# Altium PCB Electronic_dc_load_v2.PcbDoc (part 2 of 2)
Units mil, origin at the board's own origin, x right, y up, seen from the top; angles counter-clockwise.
Board outline 20669.29 x 4035.43 mil, 2 copper layers (Top Layer, Bottom Layer); 130 components, 99 nets, 414 pads, 0 vias.
Unrouted connection lines stored in the file: 291.
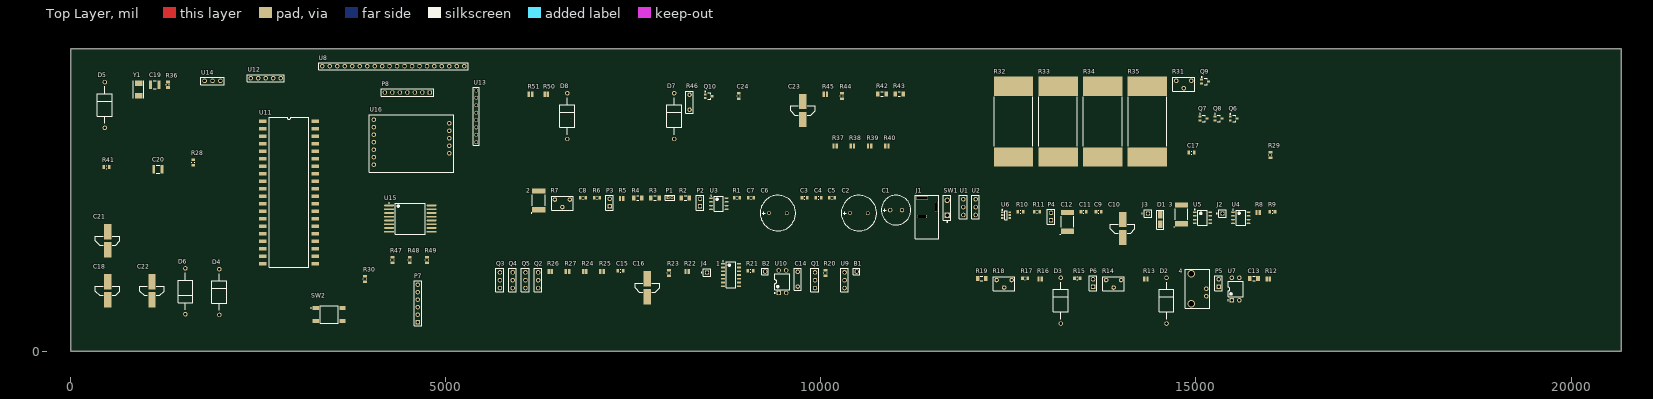
[diagram p0: Top Layer view]

## Part data (continued)
R14: "BOURNS         3296Y-1-504LF            TRIMMER, 25 TURN 500K", Color=Blue, Manufacturer=Bourns, Manufacturer Part Number=3296Y-1-504LF, Max Operating Temperature=125°C, Max Power Dissipation=500mW, Min Operating Temperature=-55°C, Package Quantity=50, Resistance=500kR, Resistance Tolerance=10%, Resistor Type=Cermet, Temperature Coefficient=100ppm/°C, Voltage Rating=300V, Category="Variable Resistors and Potentiometers", ComponentLink1Description=https://datasheet.ciiva.com/11832/0900766b8069ccf4-11832260.pdf?src-supplier=RSComponents, ComponentLink1URL=https://datasheet.ciiva.com/11832/0900766b8069ccf4-11832260.pdf?src-supplier=RSComponents, ComponentLink2Description=https://datasheet.ciiva.com/29122/447312-da-01-en-trimmer-tht-3296y-1-504lf-500k-0-5w-29122395.pdf?src-supplier=Conrad, ComponentLink2URL=https://datasheet.ciiva.com/29122/447312-da-01-en-trimmer-tht-3296y-1-504lf-500k-0-5w-29122395.pdf?src-supplier=Conrad, ComponentLink3Description=https://datasheet.ciiva.com/2156/3296-2156913.pdf?src-supplier=Digi-Key, ComponentLink3URL=https://datasheet.ciiva.com/2156/3296-2156913.pdf?src-supplier=Digi-Key, ComponentLink4Description=https://datasheet.ciiva.com/1131/1815117-1131508.pdf?src-supplier=Element14, ComponentLink4URL=https://datasheet.ciiva.com/1131/1815117-1131508.pdf?src-supplier=Element14, ComponentLink5Description=https://datasheet.ciiva.com/3266/3296-3266550.pdf?src-supplier=Avnet, ComponentLink5URL=https://datasheet.ciiva.com/3266/3296-3266550.pdf?src-supplier=Avnet, ComponentLink6Description=https://datasheet.ciiva.com/20164/68-0300e-20164135.pdf?src-supplier=Rapid+Electronics, ComponentLink6URL=https://datasheet.ciiva.com/20164/68-0300e-20164135.pdf?src-supplier=Rapid+Electronics, ComponentLink7Description=https://datasheet.ciiva.com/16716/70153578-16716249.pdf?src-supplier=Allied+Electronics, ComponentLink7URL=https://datasheet.ciiva.com/16716/70153578-16716249.pdf?src-supplier=Allied+Electronics, ComponentLink8Description=https://datasheet.ciiva.com/30113/3296-30113148.pdf?src-supplier=Onlinecomponents.com, ComponentLink8URL=https://datasheet.ciiva.com/30113/3296-30113148.pdf?src-supplier=Onlinecomponents.com, ComponentLink9Description=https://datasheet.ciiva.com/32423/dabourns3296-data-e-32423743.pdf?src-supplier=Distrelec, ComponentLink9URL=https://datasheet.ciiva.com/32423/dabourns3296-data-e-32423743.pdf?src-supplier=Distrelec, Depth=4.83mm, Height=0.395inch, Lead Diameter=0.5mm, Lead Free="Lead Free", Length=9.53mm, Military Standard=Not, Mount="Through Hole,Panel,PCB", Number of Turns=25, Packaging=Rail/Tube, Power Rating=500mW, Pricing 1="1=2.41000, 10=2.11700, 25=1.89800, 50=1.82500, 100=1.75200, 250=1.67900, 500=1.38700, 1000=1.31400, 5000=1.09500 (USD)", Radiation Hardening=No, REACH SVHC="No SVHC", RoHS=Yes, RoHS Compliant=Yes, Series=3296, Stock 1=290, Supplier 1=Digi-Key, Taper=Linear, Technology=CERMET, Termination=Pin, Tolerance=10%, Voltage Rating (DC)=300V, Weight=0.03oz, Width=0.19inch
R17 R20 R21 R28 R29 R36 R41: "VISHAY   MCW0406MD1001BP100   RES, THIN FILM, 1K, 0.1%, 0.25W, 0406", Case Code (Imperial)=0406, Case Code (Metric)=1610, Manufacturer=Vishay, Manufacturer Part Number=MCW0406MD1001BP100, Max Operating Temperature=155°C, Max Power Dissipation=250mW, Min Operating Temperature=-55°C, Package Quantity=1000, Resistance Tolerance=0.1%, Resistor Type="Thin Film", Supplier Part Number 1=31W9014, Temperature Coefficient=25ppm/°C, Voltage Rating=50V, Case/Package=0406, Category="Chip SMD Resistors", ComponentLink1Description=https://datasheet.ciiva.com/2610/mcw406atpre-2610743.pdf?src-supplier=Digi-Key, ComponentLink1URL=https://datasheet.ciiva.com/2610/mcw406atpre-2610743.pdf?src-supplier=Digi-Key, ComponentLink2Description=https://datasheet.ciiva.com/2610/mcw406atpre-2610744.pdf?src-supplier=Digi-Key, ComponentLink2URL=https://datasheet.ciiva.com/2610/mcw406atpre-2610744.pdf?src-supplier=Digi-Key, ComponentLink3Description=https://datasheet.ciiva.com/2610/mcw406atpre-2610745.pdf?src-supplier=Digi-Key, ComponentLink3URL=https://datasheet.ciiva.com/2610/mcw406atpre-2610745.pdf?src-supplier=Digi-Key, Construction=Rectangular, Contact Plating=Tin, Depth=1.5mm, Features="Automotive AEC-Q200,Moisture Resistant,Anti-Sulfur", Height=0.014inch, Height - Seated (Max)=0.014inch, Lead Free="Lead Free", Length=0.039inch, Military Standard=Not, Number of Terminations=2, Packaging="Tape and Reel", Power Rating=250mW, Pricing 1="1000=0.44000 (USD)", REACH SVHC=Unknown, Resistance=1kR, RoHS=Yes, RoHS Compliant=Yes, Series="MCW0406 - Precision", Size Code=0406, Supplier 1=Newark, Tolerance=0.1%, Voltage Rating (DC)=50V, Width=0.063inch
R19: "Resistor SMD 4.7 MOhm  ±  1 % 1206, CRCW12064M70FKEA, Vishay", Case Code (Imperial)=1206, Case Code (Metric)=3216, Manufacturer=Vishay, Manufacturer Part Number=CRCW12064M70FKEA, Max Operating Temperature=155°C, Max Power Dissipation=250mW, Min Operating Temperature=-55°C, Package Quantity=10, Resistance=4.7MR, Resistance Tolerance=1%, Resistor Type="Thick Film", Supplier Part Number 1=541-4.70MFCT-ND, Temperature Coefficient=100ppm/°C, Voltage Rating=200V, Case/Package=1206, Category="Chip SMD Resistors", ComponentLink1Description=https://datasheet.ciiva.com/11811/0900766b80d98b5e-11811376.pdf?src-supplier=RSComponents, ComponentLink1URL=https://datasheet.ciiva.com/11811/0900766b80d98b5e-11811376.pdf?src-supplier=RSComponents, ComponentLink2Description=https://datasheet.ciiva.com/2497/dcrcwe3-2497009.pdf?src-supplier=Digi-Key, ComponentLink2URL=https://datasheet.ciiva.com/2497/dcrcwe3-2497009.pdf?src-supplier=Digi-Key, ComponentLink3Description=https://datasheet.ciiva.com/2497/dcrcwe3-2497010.pdf?src-supplier=Digi-Key, ComponentLink3URL=https://datasheet.ciiva.com/2497/dcrcwe3-2497010.pdf?src-supplier=Digi-Key, ComponentLink4Description=https://datasheet.ciiva.com/2497/dcrcwe3-2497011.pdf?src-supplier=Digi-Key, ComponentLink4URL=https://datasheet.ciiva.com/2497/dcrcwe3-2497011.pdf?src-supplier=Digi-Key, ComponentLink5Description=https://datasheet.ciiva.com/6074/1697337-6074135.pdf?src-supplier=Farnell, ComponentLink5URL=https://datasheet.ciiva.com/6074/1697337-6074135.pdf?src-supplier=Farnell, ComponentLink6Description=https://datasheet.ciiva.com/7843/1697337-7843431.pdf?src-supplier=Element14, ComponentLink6URL=https://datasheet.ciiva.com/7843/1697337-7843431.pdf?src-supplier=Element14, ComponentLink7Description=https://datasheet.ciiva.com/7843/1697337-7843432.pdf?src-supplier=Element14, ComponentLink7URL=https://datasheet.ciiva.com/7843/1697337-7843432.pdf?src-supplier=Element14, ComponentLink8Description=https://datasheet.ciiva.com/8896/dcrcwe3-8896296.pdf?src-supplier=Avnet, ComponentLink8URL=https://datasheet.ciiva.com/8896/dcrcwe3-8896296.pdf?src-supplier=Avnet, ComponentLink9Description=https://datasheet.ciiva.com/16894/dcrcwe3-16894747.pdf?src-supplier=Avnet+Europe, ComponentLink9URL=https://datasheet.ciiva.com/16894/dcrcwe3-16894747.pdf?src-supplier=Avnet+Europe, ComponentLink10Description=https://datasheet.ciiva.com/22706/1697337-22706301.pdf?src-supplier=Element14, ComponentLink10URL=https://datasheet.ciiva.com/22706/1697337-22706301.pdf?src-supplier=Element14, ComponentLink11Description=https://datasheet.ciiva.com/26316/fld-crcw-e3-data-en-26316494.pdf?src-supplier=Distrelec, ComponentLink11URL=https://datasheet.ciiva.com/26316/fld-crcw-e3-data-en-26316494.pdf?src-supplier=Distrelec, Construction=Rectangular, Contact Plating=Tin, Depth=1.6mm, Features="Automotive AEC-Q200", Height=0.55mm, Lead Free="Lead Free", Length=3.2mm, Military Standard=Not, Number of Pins=2, Number of Terminations=2, Packaging="Tape and Reel", Power Rating=250mW, Pricing 1="1=0.10000, 10=0.08000, 100=0.03060, 1000=0.01346, 2500=0.01162 (USD)", Radiation Hardening=No, REACH SVHC=Unknown, RoHS=Yes, RoHS Compliant=Yes, Series=CRCW, Stock 1=13706, Supplier 1=Digi-Key, Technology="THICK FILM", Termination=SMD/SMT, Tolerance=1%, Voltage Rating (DC)=200V, Weight=0.000353oz, Width=0.063inch
R31: "GLOVE, POLYAMIDE, L/FREE, PU, SIZE 6 - More Details", Color=Blue, Manufacturer=Bourns, Manufacturer Part Number=3296Y-1-201LF, Max Operating Temperature=125°C, Max Power Dissipation=500mW, Min Operating Temperature=-55°C, Package Quantity=50, Resistance Tolerance=10%, Resistor Type=Cermet, Supplier Part Number 1=3296Y-201LF-ND, Temperature Coefficient=100ppm/°C, Voltage Rating=300V, Category="Variable Resistors and Potentiometers", ComponentLink1Description=https://datasheet.ciiva.com/11831/0900766b8069ccf4-11831017.pdf?src-supplier=RSComponents, ComponentLink1URL=https://datasheet.ciiva.com/11831/0900766b8069ccf4-11831017.pdf?src-supplier=RSComponents, ComponentLink2Description=https://datasheet.ciiva.com/29122/447304-da-01-en-trimmer-tht3296y-1-201lf-200r-0-5w-29122391.pdf?src-supplier=Conrad, ComponentLink2URL=https://datasheet.ciiva.com/29122/447304-da-01-en-trimmer-tht3296y-1-201lf-200r-0-5w-29122391.pdf?src-supplier=Conrad, ComponentLink3Description=https://datasheet.ciiva.com/16716/70153578-16716822.pdf?src-supplier=Allied+Electronics, ComponentLink3URL=https://datasheet.ciiva.com/16716/70153578-16716822.pdf?src-supplier=Allied+Electronics, ComponentLink4Description=https://datasheet.ciiva.com/30066/3296-30066951.pdf?src-supplier=Onlinecomponents.com, ComponentLink4URL=https://datasheet.ciiva.com/30066/3296-30066951.pdf?src-supplier=Onlinecomponents.com, ComponentLink5Description=https://datasheet.ciiva.com/2158/3296-2158313.pdf?src-supplier=Digi-Key, ComponentLink5URL=https://datasheet.ciiva.com/2158/3296-2158313.pdf?src-supplier=Digi-Key, ComponentLink6Description=https://datasheet.ciiva.com/1131/1815117-1131451.pdf?src-supplier=Element14, ComponentLink6URL=https://datasheet.ciiva.com/1131/1815117-1131451.pdf?src-supplier=Element14, ComponentLink7Description=https://datasheet.ciiva.com/14173/dabourns3296-data-e-14173005.pdf?src-supplier=Distrelec, ComponentLink7URL=https://datasheet.ciiva.com/14173/dabourns3296-data-e-14173005.pdf?src-supplier=Distrelec, Depth=4.83mm, Height=0.395inch, Lead Diameter=0.5mm, Lead Free="Lead Free", Length=9.53mm, Military Standard=Not, Mount="Through Hole,Panel,PCB", Number of Turns=25, Packaging=Rail/Tube, Power Rating=500mW, Pricing 1="1=2.41000, 10=2.11700, 25=1.89800, 50=1.82500, 100=1.75200, 250=1.67900, 500=1.38700, 1000=1.31400, 5000=1.09500 (USD)", Radiation Hardening=No, REACH SVHC="No SVHC", Resistance=200R, RoHS=Yes, RoHS Compliant=Yes, Series=3296, Stock 1=3, Supplier 1=Digi-Key, Taper=Linear, Technology=CERMET, Termination=Pin, Tolerance=10%, Voltage Rating (DC)=300V, Weight=0.03oz, Width=9.53mm
R32 R33 R34 R35: "RES 1 OHM 5W 1% AXIAL", Case/Package=Conformal, Manufacturer="Vishay BCcomponents", Manufacturer Part Number=PAC500001008FAC000, Max Operating Temperature=275°C, Max Power Dissipation=5W, Min Operating Temperature=-55°C, Package Quantity=1, Resistor Type=Wirewound, Supplier Part Number 1=71-PAC500001008FAC00, Temperature Coefficient=100ppm/°C, Tolerance=1%, Category="Through-Hole Resistors", ComponentLink1Description=https://datasheet.ciiva.com/2720/pacserie-2720053.pdf?src-supplier=Digi-Key, ComponentLink1URL=https://datasheet.ciiva.com/2720/pacserie-2720053.pdf?src-supplier=Digi-Key, ComponentLink2Description=https://datasheet.ciiva.com/2720/pacserie-2720054.pdf?src-supplier=Digi-Key, ComponentLink2URL=https://datasheet.ciiva.com/2720/pacserie-2720054.pdf?src-supplier=Digi-Key, ComponentLink3Description=https://datasheet.ciiva.com/8401/pacserie-8401197.pdf?src-supplier=Avnet, ComponentLink3URL=https://datasheet.ciiva.com/8401/pacserie-8401197.pdf?src-supplier=Avnet, Construction=Cylindrical, Contact Plating=Tin, Diameter=7.5mm, Features="Flame Retardant Coating", Length=26mm, Military Standard=Not, Mount="Through Hole", Number of Terminations=2, Packaging="Tape and Reel", Power Rating=5W, Pricing 1="1=1.28000, 10=0.95500, 50=0.95500, 100=0.69800, 1000=0.48800, 10000=0.45600 (USD)", Radiation Hardening=No, Resistance=1R, RoHS=Yes, RoHS Compliant=Yes, Series=PAC, Stock 1=101, Supplier 1=Mouser, Termination=Axial
R37 R38 R39 R40: "270KR ±0.1%  0.25W"
R46: "BOURNS - PWR220T-35-R100F - RESISTOR, POWER, 0.1R, 0.01, 35W", Case/Package=TO-220, Manufacturer=Bourns, Manufacturer Part Number=PWR220T-35-R100F, Max Operating Temperature=155°C, Max Power Dissipation=35W, Min Operating Temperature=-55°C, Package Quantity=50, Resistance=100mR, Resistance Tolerance=1%, Resistor Type="Thick Film", Supplier Part Number 1=PWR220T-35-R100F-ND, Temperature Coefficient=100ppm/°C, Threshold Voltage=1.4V, Voltage Rating=2kV, Voltage Rating (DC)=250V, Category="Through-Hole Resistors", ComponentLink1Description=https://datasheet.ciiva.com/7986/1869472-7986042.pdf?src-supplier=Element14, ComponentLink1URL=https://datasheet.ciiva.com/7986/1869472-7986042.pdf?src-supplier=Element14, Construction=Rectangular, Depth=4mm, Features="Automotive AEC-Q200", Height=14.6mm, Lead Diameter=0.72mm, Lead Pitch=5.08mm, Length=10.1mm, Military Standard=Not, Number of Terminations=2, Packaging=Rail/Tube, Power Rating=35W, Pricing 1="1=4.48000, 10=4.05400, 100=3.01880, 1000=2.17350, 2500=2.13900 (USD)", REACH SVHC="No SVHC", RoHS=Yes, RoHS Compliant=Yes, Series=PWR220T-35, Stock 1=660, Supplier 1=Digi-Key, Technology="THICK FILM", Termination=Radial, Tolerance=1%, Width=0.157inch
R50: "330K ohms ±0.1%  0.25W"
R51: "100K ±0.1%  0.25W"
SW1: "Single-Pole, Single-Throw Switch", LatestRevisionDate=17-Jul-2002, LatestRevisionNote="Re-released for DXP Platform.", PackageDescription="Switch; 2 Leads", PackageReference=SPST-2, Published=24-Mar-1999, Publisher="Altium Limited"
SW2: "Switch Tactile OFF (ON) SPST Round Button Gull Wing 0.05A 24VDC 2.6N SMD T/R", Package=None, Availability=Unavailable, MF="{'manufacturer': u'TE Connectivity'}", MP=FSM4JSMA, Price=None
U1: "Fairchild Semiconductor", Case/Package=TO-220-3, Dropout Voltage=2V, Manufacturer="ON Semiconductor / Fairchild", Max Input Voltage=35V, Max Operating Temperature=125°C, Max Output Current=1A, Min Input Voltage=14.5V, Min Operating Temperature=-40°C, Min Output Voltage=12V, Output Voltage Accuracy=4%, Package Quantity=50, Power Supply Rejection Ratio (PSRR)=71dB, Quiescent Current=8mA, Accuracy=4%, Category="Voltage Regulators - Linear", ComponentLink1Description=https://datasheet.ciiva.com/26908/lm7812ct-26908840.pdf?src-supplier=IIIC, ComponentLink1URL=https://datasheet.ciiva.com/26908/lm7812ct-26908840.pdf?src-supplier=IIIC, ComponentLink2Description=https://datasheet.ciiva.com/2039/lm7805-2039371.pdf?src-supplier=Digi-Key, ComponentLink2URL=https://datasheet.ciiva.com/2039/lm7805-2039371.pdf?src-supplier=Digi-Key, ComponentLink3Description=https://datasheet.ciiva.com/25974/lm7812-25974492.pdf?src-supplier=Avnet+Europe, ComponentLink3URL=https://datasheet.ciiva.com/25974/lm7812-25974492.pdf?src-supplier=Avnet+Europe, Contact Plating=Tin,Matte, Height=8.89mm, Lead Free="Lead Free", Length=10.16mm, Manufacturer Part Number=LM7812CT, Mount="Through Hole", Nominal Output Voltage=12V, Number of Outputs=1, Number of Pins=3, Number of Regulators=1, Output Current=1A, Output Type=Fixed, Output Voltage=12V, Packaging=Rail/Tube, Polarity=Positive, Radiation Hardening=No, REACH SVHC="No SVHC", RoHS=Yes, RoHS Compliant=Yes, Stock 1=6000, Supplier 1=Avnet, Supplier Part Number 1=LM7812CT, Weight=1.214g, Width=4.7mm
U2: "Standard Regulator Pos 5V 2.2A 3-Pin(3+Tab) TO-220AB Rail", Case/Package=TO-220-3, Current Rating=1A, Dropout Voltage=2V, Manufacturer="ON Semiconductor / Fairchild", Max Input Voltage=35V, Max Operating Temperature=125°C, Max Output Voltage=5.2V, Min Input Voltage=7V, Min Operating Temperature=-40°C, Min Output Voltage=5V, Output Voltage Accuracy=4%, Package Quantity=50, Power Supply Rejection Ratio (PSRR)=73dB, Quiescent Current=8mA, Accuracy=4%, Category="Voltage Regulators - Linear", ComponentLink1Description=https://datasheet.ciiva.com/19456/786138-19456361.pdf?src-supplier=Jameco, ComponentLink1URL=https://datasheet.ciiva.com/19456/786138-19456361.pdf?src-supplier=Jameco, ComponentLink2Description=https://datasheet.ciiva.com/26904/lm7805ct-26904988.pdf?src-supplier=IIIC, ComponentLink2URL=https://datasheet.ciiva.com/26904/lm7805ct-26904988.pdf?src-supplier=IIIC, ComponentLink3Description=https://datasheet.ciiva.com/2039/lm7805-2039365.pdf?src-supplier=Digi-Key, ComponentLink3URL=https://datasheet.ciiva.com/2039/lm7805-2039365.pdf?src-supplier=Digi-Key, ComponentLink4Description=https://datasheet.ciiva.com/8239/lm7812-8239478.pdf?src-supplier=Avnet, ComponentLink4URL=https://datasheet.ciiva.com/8239/lm7812-8239478.pdf?src-supplier=Avnet, ComponentLink5Description=https://datasheet.ciiva.com/1512/1855686-1512106.pdf?src-supplier=Element14, ComponentLink5URL=https://datasheet.ciiva.com/1512/1855686-1512106.pdf?src-supplier=Element14, ComponentLink6Description=https://datasheet.ciiva.com/17332/lm7805-17332792.pdf?src-supplier=Future+Electronics, ComponentLink6URL=https://datasheet.ciiva.com/17332/lm7805-17332792.pdf?src-supplier=Future+Electronics, ComponentLink7Description=https://datasheet.ciiva.com/1512/1855686-1512105.pdf?src-supplier=Element14, ComponentLink7URL=https://datasheet.ciiva.com/1512/1855686-1512105.pdf?src-supplier=Element14, ComponentLink8Description=https://datasheet.ciiva.com/1511/1855686-1511835.pdf?src-supplier=Element14, ComponentLink8URL=https://datasheet.ciiva.com/1511/1855686-1511835.pdf?src-supplier=Element14, ComponentLink9Description=https://datasheet.ciiva.com/48694/001253095-da-01-en-ic-reg-ldo-5v-1a-lm7805ct-to-220-3-fsc-48694790.pdf?src-supplier=Conrad, ComponentLink9URL=https://datasheet.ciiva.com/48694/001253095-da-01-en-ic-reg-ldo-5v-1a-lm7805ct-to-220-3-fsc-48694790.pdf?src-supplier=Conrad, Height=16.3mm, Lead Free="Lead Free", Length=10.67mm, Manufacturer Part Number=LM7805CT, Max Output Current=1A, Mount="Through Hole", Nominal Output Voltage=5V, Number of Outputs=1, Number of Pins=3, Number of Regulators=1, Output Current=1A, Output Type=Fixed, Output Voltage=5V, Packaging=Rail/Tube, Polarity=Positive, Pricing 1="331=1.02898, 340=1.02141, 670=1.01384, 1700=1.00628, 3400=0.99871, 17000=0.99115, 34000=0.98358 (USD)", Radiation Hardening=No, REACH SVHC="No SVHC", RoHS=Yes, RoHS Compliant=Yes, Stock 1=9559, Supplier 1=Avnet, Supplier Part Number 1=LM7805CT, Weight=1.214g, Width=4.7mm
U3: "Operational Amplifier Single 1 MHz SO-8, OPA277UA, Texas Instruments", Case/Package=D, Dual Supply Voltage=9V, Input Bias Current=2.8nA, Input Offset Voltage (Vos)=20uV, Manufacturer="Texas Instruments", Manufacturer Part Number=OPA277UA, Max Dual Supply Voltage=18V, Max I/O Voltage=50uV, Max Operating Temperature=85°C, Min Dual Supply Voltage=2V, Min Operating Temperature=-40°C, Nominal Supply Current=825uA, Operating Supply Current=790uA, Output Current per Channel=35mA, Package Quantity=75, Supplier Part Number 1=OPA277UA-ND, Voltage Gain=140dB, Bandwidth=1MHz, Category="Amplifiers - Op Amps, Buffer, Instrumentation", Common Mode Rejection Ratio=115dB, ComponentLink1Description=https://datasheet.ciiva.com/2973/opa4277-2973984.pdf?src-supplier=Avnet, ComponentLink1URL=https://datasheet.ciiva.com/2973/opa4277-2973984.pdf?src-supplier=Avnet, ComponentLink2Description=https://datasheet.ciiva.com/1799/opa277-1799267.pdf?src-supplier=Digi-Key, ComponentLink2URL=https://datasheet.ciiva.com/1799/opa277-1799267.pdf?src-supplier=Digi-Key, ComponentLink3Description=https://datasheet.ciiva.com/7738/1830880-7738390.pdf?src-supplier=Element14, ComponentLink3URL=https://datasheet.ciiva.com/7738/1830880-7738390.pdf?src-supplier=Element14, ComponentLink4Description=https://datasheet.ciiva.com/26243/opa4277-26243593.pdf?src-supplier=Avnet+Europe, ComponentLink4URL=https://datasheet.ciiva.com/26243/opa4277-26243593.pdf?src-supplier=Avnet+Europe, Contact Plating=Gold, Gain Bandwidth Product=1MHz, Height=1.58mm, Lead Free="Lead Free", Length=4.9mm, Max Supply Voltage=18V, Nominal Gain Bandwidth Product=1MHz, Number of Amplifiers=1, Number of Channels=1, Number of Circuits=1, Number of Elements=1, Number of Pins=8, Packaging=Rail/Tube, Pricing 1="1=3.72000, 10=3.34300, 25=3.16000, 100=2.73880, 250=2.59832, 500=2.33148, 1000=2.21275 (USD)", Radiation Hardening=No, REACH SVHC="No SVHC", RoHS=Yes, RoHS Compliant=Yes, Slew Rate=0.8V/µs, Stock 1=3292, Supplier 1=Digi-Key, Unity Gain Bandwidth Product=1MHz, Width=3.91mm
U4: "V-Ref Adjustable 2.5V to 36V 100mA 8-Pin SOP T/R", Case/Package=SOP, Cathode Current=1mA, Current Rating=100mA, Manufacturer="ON Semiconductor / Fairchild", Max Input Voltage=36V, Max Operating Temperature=85°C, Min Operating Temperature=-25°C, Min Output Voltage=2.5V, Package Quantity=3000, Temperature Coefficient=50ppm/°C, Tolerance=2%, Category="Voltage References", ComponentLink1Description=https://datasheet.ciiva.com/4908/lm431a-189989-4908452.pdf?src-supplier=Mouser, ComponentLink1URL=https://datasheet.ciiva.com/4908/lm431a-189989-4908452.pdf?src-supplier=Mouser, ComponentLink2Description=https://datasheet.ciiva.com/29571/lm431a-29571926.pdf?src-supplier=Digi-Key, ComponentLink2URL=https://datasheet.ciiva.com/29571/lm431a-29571926.pdf?src-supplier=Digi-Key, ComponentLink3Description=https://datasheet.ciiva.com/29571/lm431a-29571925.pdf?src-supplier=Digi-Key, ComponentLink3URL=https://datasheet.ciiva.com/29571/lm431a-29571925.pdf?src-supplier=Digi-Key, ComponentLink4Description=https://datasheet.ciiva.com/9215/lm431c-9215048.pdf?src-supplier=Avnet, ComponentLink4URL=https://datasheet.ciiva.com/9215/lm431c-9215048.pdf?src-supplier=Avnet, Lead Free="Lead Free", Manufacturer Part Number=LM431ACMX, Max Output Current=100mA, Max Output Voltage=36V, Mount="Surface Mount", Number of Channels=1, Number of Pins=8, Output Current=100mA, Output Type=Adjustable, Output Voltage=36V, Packaging="Tape and Reel", Reference Type=Shunt,Adjustable, RoHS=Yes, RoHS Compliant=Yes, Series=-, Stock 1=40099, Supplier 1=Avnet, Supplier Part Number 1=LM431ACMX, Weight=0.2304g
U5: "LINEAR TECHNOLOGY - LTC1046CS8#PBF - VOLT CONVERTER, SMD, SOIC8, 1046", Case/Package=SOIC, Manufacturer="Analog Devices / Linear Technology", Manufacturer Part Number=LTC1046CS8#PBF, Max Input Voltage=6V, Max Operating Temperature=70°C, Max Output Current=50mA, Max Output Voltage=-1.5V, Min Input Voltage=1.5V, Min Operating Temperature=0°C, Min Output Voltage=-6V, Operating Supply Current=165uA, Output Voltage=3V, Package Quantity=100, Supplier Part Number 1=LTC1046CS8#PBF-ND, Switching Frequency=30kHz, Category="Voltage Regulators - Switching", ComponentLink1Description=https://datasheet.ciiva.com/2024/2898-2024864.pdf?src-supplier=Digi-Key, ComponentLink1URL=https://datasheet.ciiva.com/2024/2898-2024864.pdf?src-supplier=Digi-Key, ComponentLink2Description=https://datasheet.ciiva.com/30477/0900766b8125257c-30477616.pdf?src-supplier=RSComponents, ComponentLink2URL=https://datasheet.ciiva.com/30477/0900766b8125257c-30477616.pdf?src-supplier=RSComponents, ComponentLink3Description=https://datasheet.ciiva.com/15114/getdatasheetpartid-135603-15114038.pdf?src-supplier=Verical, ComponentLink3URL=https://datasheet.ciiva.com/15114/getdatasheetpartid-135603-15114038.pdf?src-supplier=Verical, ComponentLink4Description=https://datasheet.ciiva.com/19474/1745629-19474318.pdf?src-supplier=Jameco, ComponentLink4URL=https://datasheet.ciiva.com/19474/1745629-19474318.pdf?src-supplier=Jameco, ComponentLink5Description=https://datasheet.ciiva.com/26898/ltc1046cs8-pbf-26898654.pdf?src-supplier=IIIC, ComponentLink5URL=https://datasheet.ciiva.com/26898/ltc1046cs8-pbf-26898654.pdf?src-supplier=IIIC, ComponentLink6Description=https://datasheet.ciiva.com/6185/1573420-6185372.pdf?src-supplier=Farnell, ComponentLink6URL=https://datasheet.ciiva.com/6185/1573420-6185372.pdf?src-supplier=Farnell, Height=1.498mm, Lead Free="Lead Free", Length=5mm, Max Supply Voltage=6V, Min Supply Voltage=1.5V, Number of Outputs=1, Number of Pins=8, Output Current=50mA, Output Type=Adjustable, Packaging="Cut Tape", Pricing 1="1=6.96000, 10=6.29000, 25=5.99760, 100=5.20760, 250=4.97352, 500=4.53468, 1000=4.14000 (USD)", Radiation Hardening=No, REACH SVHC="No SVHC", RoHS=Yes, RoHS Compliant=Yes, Series=-, Stock 1=46, Supplier 1=Digi-Key, Synchronous Rectifier=No, Width=3.988mm
U6: "INVERTER SCHMITT TRIGGER, SOT-23-6, FULL REEL; Logic Type:Inverter Schmitt Trigger; Output Current:32mA; No. of Inputs:1; Supply Voltage Min:1.65V; Supply Voltage Max:5.5V; Logic Case Style:SOT-23; No. of Pins:6; Family Type:LVC ;RoHS Compliant: Yes", Case/Package=SOT-23, High Level Output Current=-32mA, Low Level Output Current=32mA, Manufacturer="Texas Instruments", Max Operating Temperature=125°C, Max Supply Voltage=5.5V, Min Operating Temperature=-40°C, Min Supply Voltage=1.65V, Package Quantity=3000, Quiescent Current=10uA, Supplier Part Number 1=296-13010-1-ND, Category="Logic Gates", ComponentLink1Description=https://datasheet.ciiva.com/4827/sn74lvc2g14-50958-4827361.pdf?src-supplier=Mouser, ComponentLink1URL=https://datasheet.ciiva.com/4827/sn74lvc2g14-50958-4827361.pdf?src-supplier=Mouser, ComponentLink2Description=https://datasheet.ciiva.com/28540/1772571-28540805.pdf?src-supplier=Element14, ComponentLink2URL=https://datasheet.ciiva.com/28540/1772571-28540805.pdf?src-supplier=Element14, ComponentLink3Description=https://datasheet.ciiva.com/15089/getdatasheetpartid-44147-15089068.pdf?src-supplier=Verical, ComponentLink3URL=https://datasheet.ciiva.com/15089/getdatasheetpartid-44147-15089068.pdf?src-supplier=Verical, ComponentLink4Description=https://datasheet.ciiva.com/34301/1046238-34301917.pdf?src-supplier=Jameco, ComponentLink4URL=https://datasheet.ciiva.com/34301/1046238-34301917.pdf?src-supplier=Jameco, ComponentLink5Description=https://datasheet.ciiva.com/1864/sn74lvc2g14-1864305.pdf?src-supplier=Digi-Key, ComponentLink5URL=https://datasheet.ciiva.com/1864/sn74lvc2g14-1864305.pdf?src-supplier=Digi-Key, ComponentLink6Description=https://datasheet.ciiva.com/1864/sn74lvc2g14-1864306.pdf?src-supplier=Digi-Key, ComponentLink6URL=https://datasheet.ciiva.com/1864/sn74lvc2g14-1864306.pdf?src-supplier=Digi-Key, ComponentLink7Description=https://datasheet.ciiva.com/1864/sn74lvc2g14-1864307.pdf?src-supplier=Digi-Key, ComponentLink7URL=https://datasheet.ciiva.com/1864/sn74lvc2g14-1864307.pdf?src-supplier=Digi-Key, ComponentLink8Description=https://datasheet.ciiva.com/14288/sn74lvc2g14-14288309.pdf?src-supplier=Avnet, ComponentLink8URL=https://datasheet.ciiva.com/14288/sn74lvc2g14-14288309.pdf?src-supplier=Avnet, ComponentLink9Description=https://datasheet.ciiva.com/26042/sn74lvc2g14-26042406.pdf?src-supplier=Avnet+Europe, ComponentLink9URL=https://datasheet.ciiva.com/26042/sn74lvc2g14-26042406.pdf?src-supplier=Avnet+Europe, ComponentLink10Description=https://datasheet.ciiva.com/7783/1768119-7783611.pdf?src-supplier=Element14, ComponentLink10URL=https://datasheet.ciiva.com/7783/1768119-7783611.pdf?src-supplier=Element14, ComponentLink11Description=https://datasheet.ciiva.com/7783/1768119-7783612.pdf?src-supplier=Element14, ComponentLink11URL=https://datasheet.ciiva.com/7783/1768119-7783612.pdf?src-supplier=Element14, Contact Plating=Tin,Matte, Height=1.15mm, Lead Free="Lead Free", Length=2.9mm, Logic Function="Buffer,Inverter,Inverting,Schmitt Trigger", Manufacturer Part Number=SN74LVC2G14DBVR, Max Output Current=32mA, Mount="Surface Mount", Number of Bits=2, Number of Circuits=2, Number of Elements=2, Number of Gates=2, Number of Inputs=1, Number of Pins=6, Output Current=32mA, Packaging="Tape and Reel", Pricing 1="1=0.43000, 10=0.32300, 25=0.29160, 100=0.20140, 250=0.16960, 500=0.13780, 1000=0.10600 (USD)", Propagation Delay=9.5ns, Radiation Hardening=No, REACH SVHC="No SVHC", RoHS=Yes, RoHS Compliant=Yes, Schmitt Trigger Input=Yes, Stock 1=686, Supplier 1=Digi-Key, Termination=SMD/SMT, Turn-On Delay Time=4.3ns, Weight=0.000557oz, Width=1.6mm
U7 U10: "4-Pin Phototransistor Optocoupler", DatasheetVersion=Nov-2003, LatestRevisionDate=04-Mar-2005, LatestRevisionNote="Sch pins 3 & 4 Swapped.", PackageReference=DIP-4, Published=24-Mar-1999, Publisher="Altium Limited"
U8: "Grapghic LCD based  on st7920  controller  128x64"
U9: "DIODE ARRAY SCHOTTKY 100V TO220", Average Rectified Current=20A, Case/Package=TO-220-3, Forward Voltage=900mV, Manufacturer="ON Semiconductor", Max Forward Surge Current (Ifsm)=350A, Max Operating Temperature=175°C, Max Repetitive Reverse Voltage (Vrrm)=100V, Max Reverse Current=10uA, Min Operating Temperature=-65°C, Package Quantity=50, Supplier Part Number 1=MBR41H100CTGOS-ND, Category="Schottky Diodes", ComponentLink1Description=https://datasheet.ciiva.com/908/mbr41h100ct-d-908465.pdf?src-supplier=Avnet, ComponentLink1URL=https://datasheet.ciiva.com/908/mbr41h100ct-d-908465.pdf?src-supplier=Avnet, ComponentLink2Description=https://datasheet.ciiva.com/30479/0900766b812212ba-30479299.pdf?src-supplier=RSComponents, ComponentLink2URL=https://datasheet.ciiva.com/30479/0900766b812212ba-30479299.pdf?src-supplier=RSComponents, ComponentLink3Description=https://datasheet.ciiva.com/7962/mbr41h100ct-d-7962757.pdf?src-supplier=Element14, ComponentLink3URL=https://datasheet.ciiva.com/7962/mbr41h100ct-d-7962757.pdf?src-supplier=Element14, ComponentLink4Description=https://datasheet.ciiva.com/16362/mbr41h100ct-d-16362069.pdf?src-supplier=Future+Electronics, ComponentLink4URL=https://datasheet.ciiva.com/16362/mbr41h100ct-d-16362069.pdf?src-supplier=Future+Electronics, ComponentLink5Description=https://datasheet.ciiva.com/908/mbr41h100ct-d-908438.pdf?src-supplier=Digi-Key, ComponentLink5URL=https://datasheet.ciiva.com/908/mbr41h100ct-d-908438.pdf?src-supplier=Digi-Key, Current Rating=20A, Element Configuration="Common Cathode", Forward Current=20A, Height=15.75mm, Lead Free="Lead Free", Length=10.28mm, Manufacturer Part Number=MBR41H100CTG, Max Reverse Leakage Current=10uA, Max Reverse Voltage (DC)=100V, Max Surge Current=350A, Number of Pins=3, Packaging=Rail/Tube, Peak Non-Repetitive Surge Current=350A, Pricing 1="1=2.14000, 10=1.92400, 100=1.54640, 500=1.27050, 1000=1.05270, 2000=0.99000 (USD)", Radiation Hardening=No, REACH SVHC="No SVHC", RoHS=Yes, RoHS Compliant=Yes, Series=SWITCHMODE™, Stock 1=220, Supplier 1=Digi-Key, Voltage Rating (DC)=100V, Width=4.82mm
U11: "IC MCU 8BIT 28KB FLASH 44TQFP", Case/Package=TQFP, Frequency=32MHz, Manufacturer=Microchip, Manufacturer Part Number=PIC16F1779-I/PT, Max Operating Temperature=85°C, Max Supply Voltage=5.5V, Min Operating Temperature=-40°C, Min Supply Voltage=2.3V, Supplier Part Number 1=9125338P, Category=Microcontrollers, ComponentLink1Description=http://www.farnell.com/datasheets/2245186.pdf?src-supplier=Farnell, ComponentLink1URL=http://www.farnell.com/datasheets/2245186.pdf?src-supplier=Farnell, ComponentLink2Description=http://www.mouser.com/ds/2/268/40001819B-1066584.pdf?src-supplier=Mouser, ComponentLink2URL=http://www.mouser.com/ds/2/268/40001819B-1066584.pdf?src-supplier=Mouser, ComponentLink3Description=http://www.microchip.com/mymicrochip/filehandler.aspx?ddocname=en584356&src-supplier=Digi-Key, ComponentLink3URL=http://www.microchip.com/mymicrochip/filehandler.aspx?ddocname=en584356&src-supplier=Digi-Key, ComponentLink4Description=http://www.farnell.com/datasheets/1993941.pdf?src-supplier=Element14, ComponentLink4URL=http://www.farnell.com/datasheets/1993941.pdf?src-supplier=Element14, Core Architecture=PIC, Interface=I2C,SPI,UART,USART,LIN, Memory Size=28KB, Memory Type=FLASH, Number of I/Os=36, Number of Pins=44, Oscillator Type=Internal, Packaging=Tray, Peripherals="Brown-out Detect/Reset,POR,PWM,WDT", Pricing 1="10=3.22200, 24=3.14200, 100=3.06100 (USD)", RAM Size=2KB, REACH SVHC="No SVHC", RoHS=Yes, RoHS Compliant=Yes, Stock 1=232, Supplier 1=RSComponents
U13: "SWITCH KEYPAD 16 KEY NON-ILLUM", Manufacturer=Parallax, Max Current Rating=30mA, Package Quantity=1, Supplier Part Number 1=27899PAR-ND, Category="Screw and Nut Drivers", ComponentLink1Description=https://datasheet.ciiva.com/19453/2161473-19453254.pdf?src-supplier=Jameco, ComponentLink1URL=https://datasheet.ciiva.com/19453/2161473-19453254.pdf?src-supplier=Jameco, ComponentLink2Description=https://datasheet.ciiva.com/12466/27899-4x4matrixmembranekeypad-v1-2-33055-12466600.pdf?src-supplier=Mouser, ComponentLink2URL=https://datasheet.ciiva.com/12466/27899-4x4matrixmembranekeypad-v1-2-33055-12466600.pdf?src-supplier=Mouser, Illumination Type=Non-Illuminated, Manufacturer Part Number=27899, Mount=Panel,Front, Pricing 1="1=7.41000 (USD)", RoHS=Yes, Stock 1=50, Supplier 1=Digi-Key, Termination=Connector
U14: "TEXAS INSTRUMENTS         LM35DZ            Temperature Sensor IC, Voltage,  0.4C, +2 C, +100 C, TO-92, 3 Pins", Case/Package=TO-92, Manufacturer="TI National Semiconductor", Max Operating Temperature=100°C, Max Supply Voltage=30V, Min Operating Temperature=0°C, Min Supply Voltage=4V, Nominal Supply Current=91.5uA, Operating Supply Current=80uA, Output Current=10mA, Output Voltage=6V, Quiescent Current=56uA, Supplier Part Number 1=92F288, Category="Temperature and Humidity Sensors", ComponentLink1Description=https://datasheet.ciiva.com/27746/82-1000e-27746599.pdf?src-supplier=Rapid+Electronics, ComponentLink1URL=https://datasheet.ciiva.com/27746/82-1000e-27746599.pdf?src-supplier=Rapid+Electronics, ComponentLink2Description=https://datasheet.ciiva.com/1166/1896190-1166283.pdf?src-supplier=Element14, ComponentLink2URL=https://datasheet.ciiva.com/1166/1896190-1166283.pdf?src-supplier=Element14, Height=5.2mm, Interface=Serial,2-Wire, Lead Free="Contains Lead", Length=5.2mm, Manufacturer Part Number=LM35DZ, Max Supply Voltage (DC)=30V, Min Supply Voltage (DC)=4V, Mount="Through Hole", Number of Pins=3, Output Type=Analog, Packaging=Bulk, REACH SVHC="No SVHC", RoHS=No, RoHS Compliant=No, Series=LM35, Supplier 1=Newark, Supply Current=91.5uA, Width=4.19mm
U15: "I2C GPIO Expander 6V 16-Pin SOIC T/R", Case/Package=SOIC, Frequency=100kHz, Manufacturer="Texas Instruments", Max Operating Temperature=85°C, Max Supply Voltage=6V, Min Operating Temperature=-40°C, Min Supply Voltage=2.5V, Package Quantity=1, Supplier Part Number 1=296-13105-1-ND, Category="Interface ICs", ComponentLink1Description=https://datasheet.ciiva.com/1780/pcf8574a-1780193.pdf?src-supplier=Digi-Key, ComponentLink1URL=https://datasheet.ciiva.com/1780/pcf8574a-1780193.pdf?src-supplier=Digi-Key, ComponentLink2Description=https://datasheet.ciiva.com/1780/pcf8574a-1780194.pdf?src-supplier=Digi-Key, ComponentLink2URL=https://datasheet.ciiva.com/1780/pcf8574a-1780194.pdf?src-supplier=Digi-Key, ComponentLink3Description=https://datasheet.ciiva.com/1780/pcf8574a-1780195.pdf?src-supplier=Digi-Key, ComponentLink3URL=https://datasheet.ciiva.com/1780/pcf8574a-1780195.pdf?src-supplier=Digi-Key, ComponentLink4Description=https://datasheet.ciiva.com/3149/pcf8574a-3149367.pdf?src-supplier=Avnet, ComponentLink4URL=https://datasheet.ciiva.com/3149/pcf8574a-3149367.pdf?src-supplier=Avnet, ComponentLink5Description=https://datasheet.ciiva.com/46411/1768199-46411463.pdf?src-supplier=Element14, ComponentLink5URL=https://datasheet.ciiva.com/46411/1768199-46411463.pdf?src-supplier=Element14, ComponentLink6Description=https://datasheet.ciiva.com/3148/pcf8574a-3148520.pdf?src-supplier=Avnet, ComponentLink6URL=https://datasheet.ciiva.com/3148/pcf8574a-3148520.pdf?src-supplier=Avnet, Contact Plating=Gold, Lead Free="Lead Free", Manufacturer Part Number=PCF8574ADWR, Max Frequency=100kHz, Number of Bits=8, Number of I/Os=8, Number of Outputs=8, Number of Pins=16, Packaging="Tape and Reel", Pricing 1="1=1.72000, 10=1.54200, 25=1.46320, 100=1.20190, 250=1.12356, 500=0.99290, 1000=0.82331 (USD)", REACH SVHC="No SVHC", RoHS=Yes, RoHS Compliant=Yes, Series=-, Stock 1=5886, Supplier 1=Digi-Key, Termination=SMD/SMT, Weight=0.014829oz
Y1: "Crystal 22.1184MHz Ã‚Â±20ppm (Tol) Ã‚Â±30ppm (Stability) 18pF FUND 50Ohm 2-Pin Mini-CSMD T/R", Package=None, Availability=Unavailable, MF="{'manufacturer': u'Abracon LLC'}", MP=ABM7-16.000MHZ-D2Y-T, Price=None

## Nets (pads, with @x,y where several pads share a name; then routed paths per layer and width w, separated by ;. In a path a pad name is that pad's centre, name@x,y a point inside that pad or via, vN(x,y) a via of type N, cw(c..) or ccw(c..) an arc to the next point about the centre after c; other vN are vias at no path point)
+5: 1.4 2.1 C1.1 C5.1 C9.1 C10.1 C11.1 C15.1 C16.1 C23.1 D1.1 P4.1 P7.2 P8.7 Q10.3 R7.2 R10.2 R16.2 R17.1 R21.2 R30.2 R47.2 R48.2 R49.2 U2.3 U3.7 U5.8 U6.5 U7.4 U8.2 U8.15 U11.11 U11.32 U12.4 U14.1 U15.16 U16.3 U16.11
+12: C4.1 C6.1 D3.K P6.1 U1.3 U2.1
-2.5V: J3.01 R8.1 R18.1 U4.2 U4.3 U4.6 U4.7
-5: C7.1 C12.2 J2.01 R3.2 R8.2 R37.1 R38.1 R39.1 R40.1 R43.2 U3.4 U5.5
DB4: U8.11 U15.7
DB5: U8.12 U15.9
DB6: U8.13 U15.10
DB7: U8.14 U15.11
E: U8.6 U15.5
GND: 1.11 4.2 B2.1 C1.2 C2.2 C3.2 C4.2 C5.2 C6.2 C7.2 C8.2 C9.2 C10.2 C11.2 C12.1 C15.2 C16.2 C17.2 C18.2 C19.1 C20.1 C21.2 C22.2 C24.2 D1.2 D7.K D8.A J1.2 J1.3 P1.1 P7.3 P8.1 Q1.3 R6.1 R9.1 R13.1 R14.2 R14.3 R31.2 R31.3 R46.1 R50.1 SW2.3 SW2.4 U1.2 U2.2 U4.1 U4.8 U5.3 U6.2 U8.1 U8.5 U8.7 U8.8 U8.9 U8.10 U8.20 U11.12 U11.31 U12.5 U14.3 U15.1 U15.2 U15.3 U15.8 U16.2 U16.12
Net1_1: 1.1 C14.2 R22.1
Net1_2: 1.2 R15.1 R19.2 R20.1 R51.1
Net1_3: 1.3 C17.1 J4.01 R23.2 R29.2
Net1_5: 1.5 R1.1 R6.2 U3.6
Net1_6: 1.6 1.7 R5.2
Net1_12: 1.12 R44.1
Net1_13: 1.13 1.14 R45.1
Net2_2: 2.2 U5.7
Net3_1: 3.1 U5.2
Net3_2: 3.2 U5.4
Net4_1: 4.1 U6.4
NetB1_1: B1.1 U9.1 U9.3
NetC2_1: C2.1 C3.1 SW1.2 U1.1
NetC8_1: C8.1 R3.1 R5.1 U11.9
NetC13_1: C13.1 R11.1 R14.1 U6.1
NetC13_2: C13.2 R13.2 U7.3
NetC14_1: C14.1 R20.2
NetC18_1: C18.1 D4.K R28.2 U11.2
NetC19_2: C19.2 U11.14 Y1.2
NetC20_2: C20.2 U11.13 Y1.1
NetC21_1: C21.1 D5.K R36.2 U11.3
NetC22_1: C22.1 D6.K R41.2 U11.4
NetC23_2: C23.2 D8.K Q10.1 R50.2
NetC24_1: C24.1 R42.1 R45.2 U11.8
NetD2_A: D2.A R12.2 U7.1
NetD2_K: D2.K P5.1 U7.2
NetD3_A: D3.A P6.2 Q1.2
NetD4_A: D4.A R28.1 U12.1
NetD5_A: D5.A R36.1 U12.2
NetD6_A: D6.A R41.1 U12.3
NetD7_A: D7.A R15.2 R32.1 R33.1 R34.1 R35.1 R44.2 R46.2
NetJ1_1: J1.1 P1.2 SW1.1
NetP2_1: P2.1 P3.1 R2.2
NetP2_2: P2.2 P3.2 R4.2
NetP4_2: P4.2 R11.2
NetP5_2: P5.2 R12.1
NetP7_1: P7.1 R30.1 SW2.1 SW2.2 U11.1
NetP7_4: P7.4 U11.40
NetP7_5: P7.5 U11.39
NetP7_6: P7.6 U11.38
NetP8_2: P8.2 U16.1
NetP8_3: P8.3 U16.10
NetP8_4: P8.4 U16.9
NetP8_5: P8.5 U16.8
NetP8_6: P8.6 U16.7
NetQ1_1: Q1.1 U10.3
NetQ2_1: Q2.1 Q9.3 R25.1
NetQ2_2: Q2.2 Q3.2 Q4.2 Q5.2 U9.2
NetQ2_3: Q2.3 Q9.1 R35.2
NetQ3_1: Q3.1 Q6.3 R26.1
NetQ3_3: Q3.3 Q6.1 R32.2
NetQ4_1: Q4.1 Q7.3 R27.1
NetQ4_3: Q4.3 Q7.1 R33.2
NetQ5_1: Q5.1 Q8.3 R24.1
NetQ5_3: Q5.3 Q8.1 R34.2
NetQ6_2: Q6.2 R37.2
NetQ7_2: Q7.2 R38.2
NetQ8_2: Q8.2 R39.2
NetQ9_2: Q9.2 R40.2
NetQ10_2: Q10.2 R51.2
NetR1_2: R1.2 R4.1 U3.2
NetR2_1: R2.1 R9.2 U3.3
NetR7_1: R7.1 U3.1
NetR7_3: R7.3 U3.8
NetR10_1: R10.1 U6.3 U6.6 U11.35
NetR16_1: R16.1 U10.4
NetR17_2: R17.2 U10.1
NetR18_2: R18.2 R19.1
NetR18_3: R18.3 U11.25
NetR21_1: R21.1 U8.19
NetR22_2: R22.2 R24.2 R25.2 R26.2 R27.2
NetR23_1: R23.1 U11.34
NetR29_1: R29.1 R31.1
NetR42_2: R42.2 R43.1
NetR47_1: R47.1 U11.18 U15.14 U16.5
NetR48_1: R48.1 U11.23 U15.15 U16.4
NetR49_1: R49.1 U11.17 U15.13
NetU10_2: U10.2 U11.7
NetU11_10: U11.10 U14.2
NetU11_19: U11.19 U13.1
NetU11_20: U11.20 U13.2
NetU11_21: U11.21 U13.3
NetU11_22: U11.22 U13.4
NetU11_27: U11.27 U13.5
NetU11_28: U11.28 U13.6
NetU11_29: U11.29 U13.7
NetU11_30: U11.30 U13.8
RS: U8.4 U15.4
RST: U8.17 U15.6
pads on no net: 1.8 1.9 1.10 4.3 4.4 U3.5 U4.4 U4.5 U5.1 U5.6 U8.3 U8.16 U8.18 U11.5 U11.6 U11.15 U11.16 U11.24 U11.26 U11.33 U11.36 U11.37 U15.12 U16.6